# EAGLE board uln-piston (EAGLE 5.10)
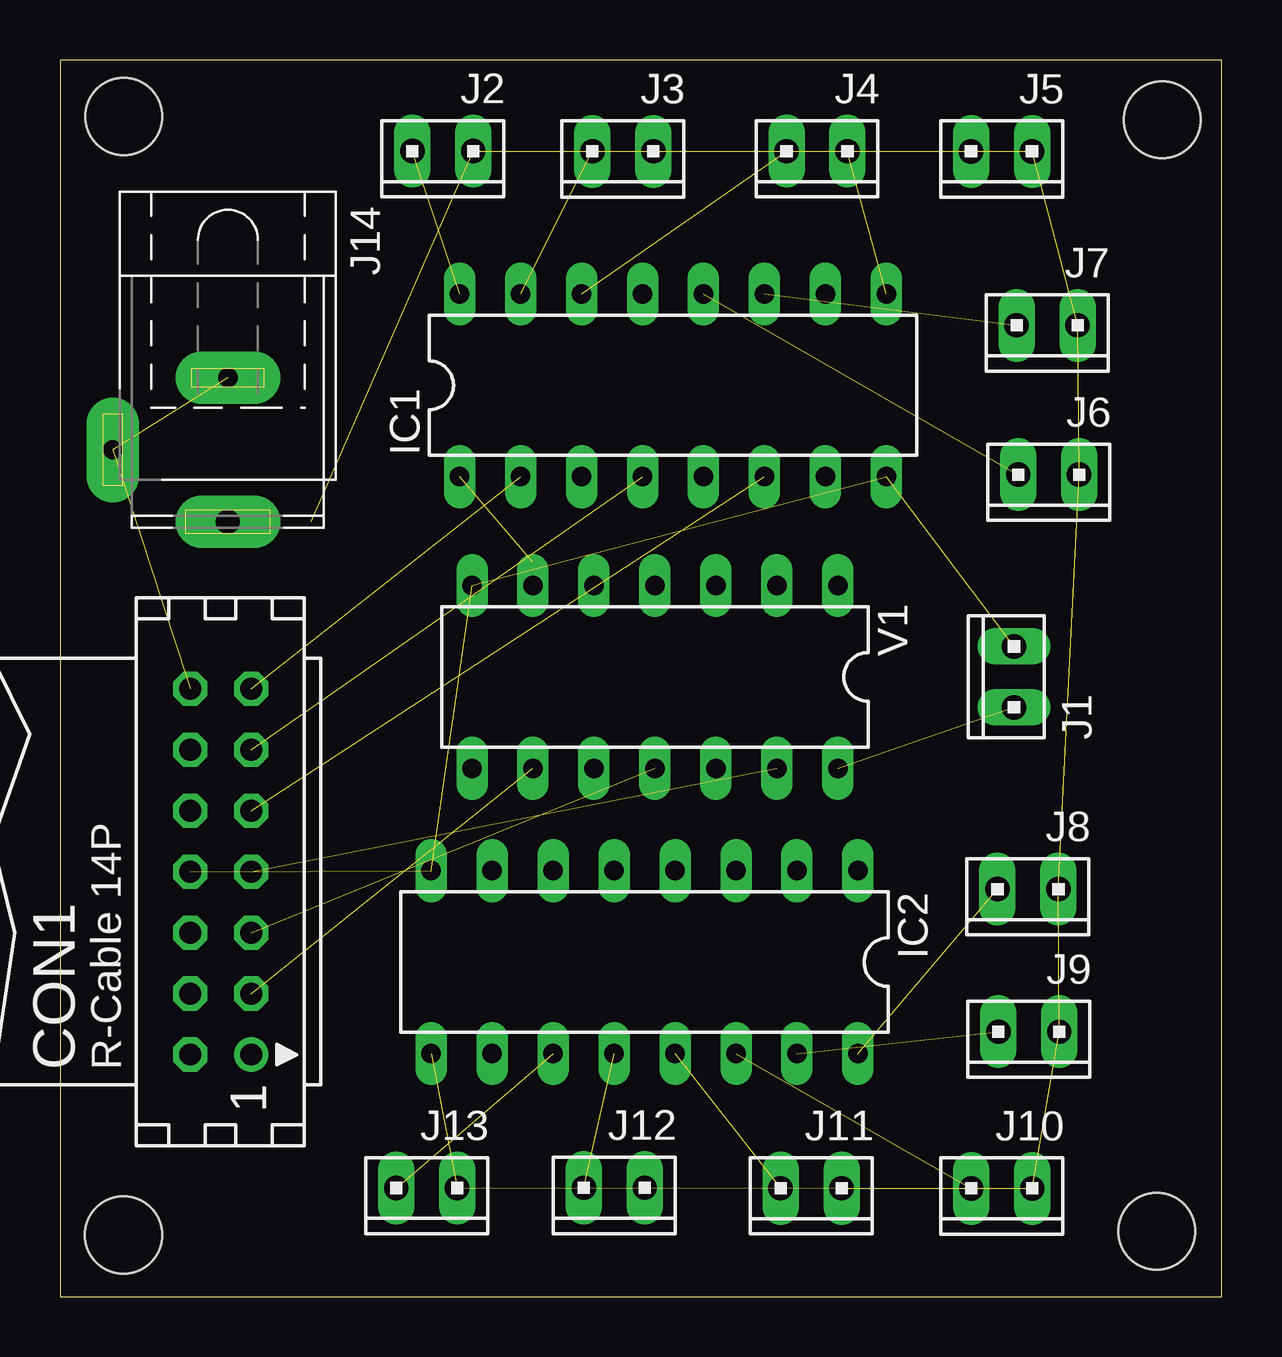
[diagram p0: board, top side]
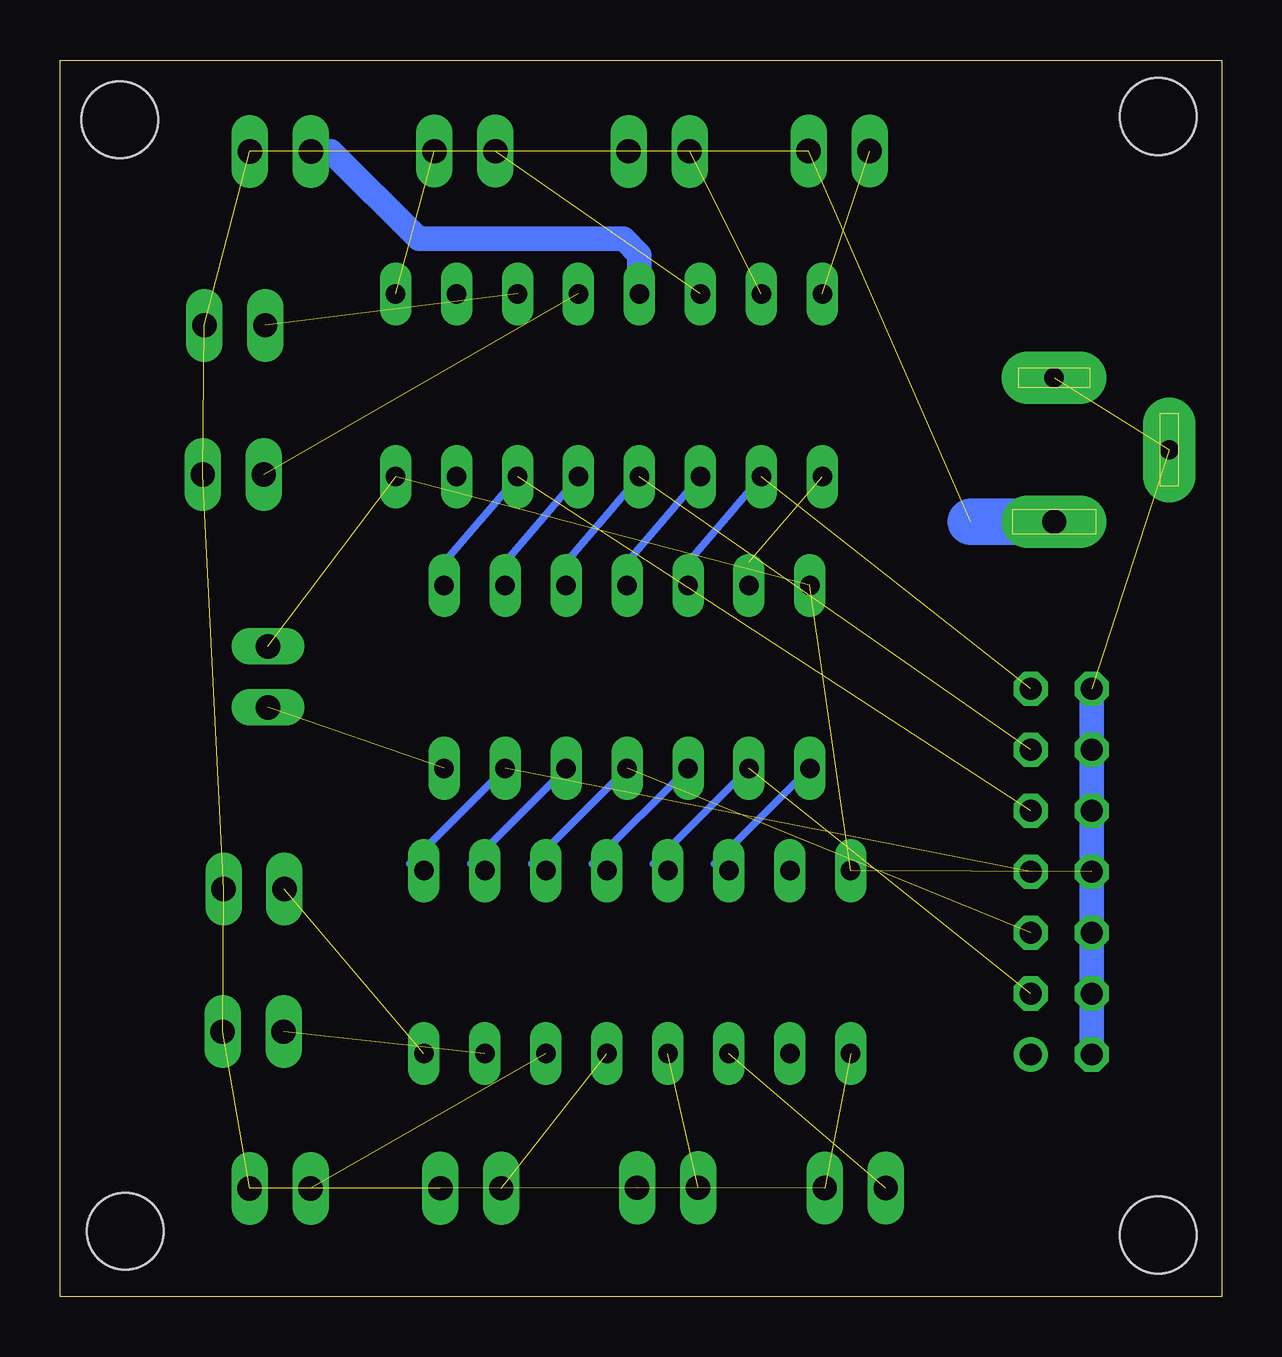
[diagram p1: board, bottom side, seen from below]

Size 48.41 x 51.52 mm. Coordinates in mm from the lower left corner, seen from the top.
Outline: 0,0 48.41,0 48.41,51.52 0,51.52 0,0
Copper layers (1*16): Top 0.035mm / dielectric 1.5mm / Bottom 0.035mm
Design rules "default": minimum track width 10mil, minimum drill 24mil, track to track 8mil, track to pad 8mil, pad to pad 8mil, via to via 8mil, smd to smd 8mil, copper to edge 40mil, drill to drill 8mil, minimum pad ring 10mil, minimum via ring 8mil, stop-mask expansion 4mil, vias tented up to drill 0mil, thermal gap 10mil
Holes 3.2 mm at 2.65,49.17 2.65,2.57 45.92,49.04 45.69,2.73

## Footprints (pad centres in the part's own frame; a part is rotated, then mirrored left to right if it is on the bottom)
CON14 = drill 0.914 round: 1 -7.62,-1.27 | drill 0.914 octagon: 2 -7.62,1.27; 3 -5.08,-1.27; 4 -5.08,1.27; 5 -2.54,-1.27; 6 -2.54,1.27; 7 0,-1.27; 8 0,1.27; 9 2.54,-1.27; 10 2.54,1.27; 11 5.08,-1.27; 12 5.08,1.27; 13 7.62,-1.27; 14 7.62,1.27
DIL16 = drill 0.813 long: 1 -8.89,-3.81; 2 -6.35,-3.81; 3 -3.81,-3.81; 4 -1.27,-3.81; 5 1.27,-3.81; 6 3.81,-3.81; 7 6.35,-3.81; 8 8.89,-3.81; 9 8.89,3.81; 10 6.35,3.81; 11 3.81,3.81; 12 1.27,3.81; 13 -1.27,3.81; 14 -3.81,3.81; 15 -6.35,3.81; 16 -8.89,3.81
10X02MTA = drill 1.016 long: 1 1.27,0; 2 -1.27,0
SPC4078 = drill 0.8 pad 2.184 long: 1 -3,0; 2 0,-4.8 | drill 1 pad 2.184 long: 3 3,0
DIL14 = drill 0.813 long: 1 -7.62,-3.81; 2 -5.08,-3.81; 3 -2.54,-3.81; 4 0,-3.81; 5 2.54,-3.81; 6 5.08,-3.81; 7 7.62,-3.81; 8 7.62,3.81; 9 5.08,3.81; 10 2.54,3.81; 11 0,3.81; 12 -2.54,3.81; 13 -5.08,3.81; 14 -7.62,3.81

## Placement (x,y rotation side)
CON1  [CON14]  6.69,17.71 90 top
IC1  ULN2003AN  [DIL16]  25.54,37.97 0 top
IC2  ULN2003AN  [DIL16]  24.36,13.94 180 top
J1  [10X02MTA]  39.75,25.82 90 top
J2  [10X02MTA]  15.95,47.73 180 top
J3  [10X02MTA]  23.45,47.72 180 top
J4  [10X02MTA]  31.54,47.73 180 top
J5  [10X02MTA]  39.23,47.72 180 top
J6  [10X02MTA]  41.19,34.25 180 top
J7  [10X02MTA]  41.13,40.47 180 top
J8  [10X02MTA]  40.33,16.98 180 top
J9  [10X02MTA]  40.37,11.04 180 top
J10  [10X02MTA]  39.24,4.51 180 top
J11  [10X02MTA]  31.3,4.52 180 top
J12  [10X02MTA]  23.1,4.53 180 top
J13  [10X02MTA]  15.28,4.52 180 top
J14  [SPC4078]  7,35.28 270 top
V1  7404N  [DIL14]  24.79,25.82 180 top

## Library data of the parts
CON1 = con-harting
IC1 IC2 = uln-udn
J1-J13 = con-amp
J14 = con-jack
V1 = 74ttl-din

## Nets
GND: CON1.2 CON1.4 CON1.6 CON1.8 CON1.10 CON1.12 CON1.14 IC1.8 IC2.8 J1.1 J14.1 J14.2 V1.7
N$1: IC1.3 V1.4
N$2: IC1.5 V1.2
N$3: CON1.13 IC1.2 V1.5
N$4: CON1.7 IC2.1 V1.13
N$5: CON1.11 IC1.4 V1.3
N$6: IC1.1 V1.6
N$7: CON1.9 IC1.6 V1.1
N$9: CON1.5 IC2.3 V1.11
N$10: CON1.3 IC2.5 V1.9
N$12: IC2.2 V1.12
N$13: IC2.4 V1.10
N$14: IC2.6 V1.8
N$15: IC1.16 J2.1
N$16: IC1.15 J3.1
N$17: IC1.14 J4.1
N$18: IC1.13 J5.1
N$19: IC1.12 J6.1
N$20: IC1.11 J7.1
N$21: IC2.16 J8.1
N$22: IC2.15 J9.1
N$23: IC2.14 J10.1
N$24: IC2.13 J11.1
N$25: IC2.12 J12.1
N$26: IC2.11 J13.1
N$28: J1.2 V1.14
VCC: IC1.9 IC2.9 J2.2 J3.2 J4.2 J5.2 J6.2 J7.2 J8.2 J9.2 J10.2 J11.2 J12.2 J13.2 J14.3

## Tracks (layer width: path | path; a pad name or v marks a point on that pad's centre or on a via)
GND  (6 unrouted)
  Bottom 1.016: CON1.2 CON1.4 CON1.6 CON1.8 CON1.10 CON1.12 CON1.14
N$1
  Bottom 0.305: IC1.3 24.79,30.6 V1.4
N$2
  Bottom 0.305: IC1.5 29.87,30.6 V1.2
N$3  (1 unrouted)
  Bottom 0.305: IC1.2 22.25,30.6 V1.5
N$4  (1 unrouted)
  Bottom 0.305: V1.13 33.85,18.03 IC2.1
N$5  (1 unrouted)
  Bottom 0.305: IC1.4 27.33,30.6 V1.3
N$6  (1 unrouted)
  Bottom 0.305: V1.6 19.71,30.6
N$7  (1 unrouted)
  Bottom 0.305: IC1.6 32.41,30.6 V1.1
N$9  (1 unrouted)
  Bottom 0.305: V1.11 28.77,18.03 IC2.3
N$10  (1 unrouted)
  Bottom 0.305: V1.9 23.69,18.03 IC2.5
N$12
  Bottom 0.305: V1.12 31.31,18.03 IC2.2
N$13
  Bottom 0.305: V1.10 26.23,18.03 IC2.4
N$14
  Bottom 0.305: V1.8 21.15,18.03 IC2.6
N$15  (1 unrouted)
N$16  (1 unrouted)
N$17  (1 unrouted)
N$18
  Bottom 1.016: IC1.13 24.27,43.41 24.93,44.07 33.47,44.07 37.12,47.72 J5.1
N$19  (1 unrouted)
N$20  (1 unrouted)
N$21  (1 unrouted)
N$22  (1 unrouted)
N$23  (1 unrouted)
N$24  (1 unrouted)
N$25  (1 unrouted)
N$26  (1 unrouted)
N$28  (1 unrouted)
VCC  (14 unrouted)
  Bottom 1.778: 10.47,32.28
  Bottom 1.93: J14.3 10.47,32.28